# Altium PCB IR_robottino_PCB2.PcbDoc
Units mm, origin at the board's own origin, x right, y up, seen from the top; angles counter-clockwise.
Board outline 8 x 15.63 mm, 4 copper layers (Top Layer, Internal Plane 1, Internal Plane 2, Bottom Layer); 4 components, 5 nets, 13 pads, 0 vias.
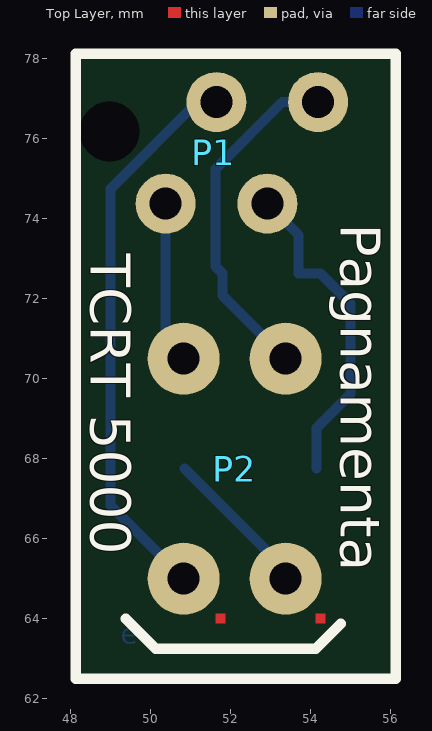
[diagram p0: Top Layer view]
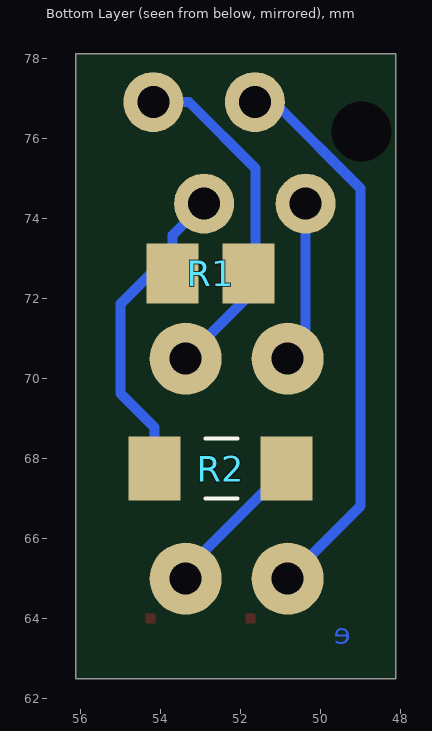
[diagram p1: Bottom Layer view, seen from below]
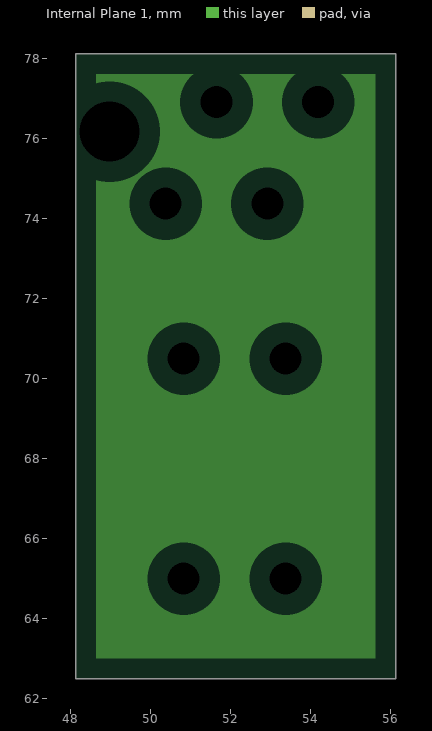
[diagram p2: Internal Plane 1, clearances drawn from the general rule]
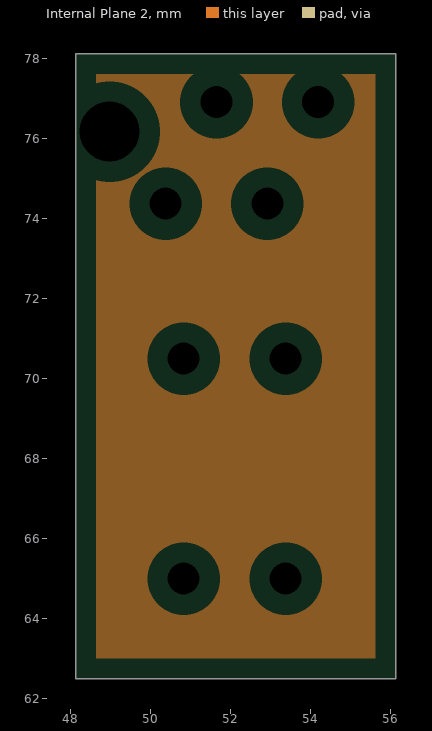
[diagram p3: Internal Plane 2, clearances drawn from the general rule]

## Layer stack, top to bottom
Top Layer: signal copper 0.0356
Dielectric: dielectric 0.32, FR-4, Dk 4.8
Internal Plane 1: plane copper 0.0356
Dielectric: dielectric 0.32, FR-4, Dk 4.8
Internal Plane 2: plane copper 0.0356
Dielectric: dielectric 0.32, FR-4, Dk 4.8
Bottom Layer: signal copper 0.0356

## Board outline
48.125,78.125 56.125,78.125 56.125,62.5 48.125,62.5

## Design rules (kind name [scope] priority, off if disabled: settings)
Clearance [All] p1: gap=0.15
PlaneClearance [All] p1: clearance=0.508
PlaneConnect [All] p1: planeconnectstyle=Direct reliefexpansion=0.508 reliefentries=4 reliefconductorwidth=0.254 reliefairgap=0.254
PolygonConnect PolygonConnect_nettie [InComponent('nt1') vs InNet('GND')] p1: connectstyle=Direct reliefconductorwidth=0.254 reliefentries=4 polygonreliefangle="90 Angle"
PolygonConnect PolygonConnect_pad [InComponent('U3') vs InNet('GND')] p2: connectstyle=Direct reliefconductorwidth=0.254 reliefentries=4 polygonreliefangle="90 Angle"
PolygonConnect [All] p3: connectstyle=Relief reliefconductorwidth=0.254 reliefentries=4 polygonreliefangle="90 Angle"
RoutingVias [All] p1: holewidth=0.35 width=0.6 viastyle="Through Hole" minholewidth=0.2 minwidth=0.4 maxholewidth=1.2 maxwidth=1
SilkscreenOverComponentPads [All] p1: minsilkscreentomaskgap=0.254
SolderMaskExpansion SolderMaskExpansion_via [IsVia] p1: expansion=-0.5
SolderMaskExpansion [All] p2: expansion=0.102
Width [All] p1: maxlimit=1 minlimit=0.203 preferedwidth=0.203
25 further rules are at their usual default settings.

## Components (designator, comment, footprint, x,y, rotation, side; value= is the part's Value field where it differs from the comment)
P1 "I2C" TYCO/215079-4 50.375,74.375 r180 top
P2 "Header 2" "TCRT 5000" 53.375,70.5 r270 top
R1 "15kOhm" R/0805 52.75,72.625 r0 bottom
R2 "75ohm" R/1206 52.5,67.75 r0 bottom

## Footprints (in the part's own frame and the unit in brackets; to place one, negate y for a bottom-side part, rotate by r counter-clockwise, add the part's x,y. Pads: shape width x height; smd on the part's side, far side on the other; paste and mask are expansions set on the pad)
R/0805 [mm] "Chip Resistor; Body 2.0 x 1.3 mm (LxW typ)"
  rect 1.3x1.5 smd: 1(-0.95,0) 2(0.95,0)
  body extent -1,-0.62 1,0.63, height 0.78
R/1206 [mm] "Chip Resistor, Body 3.2x1.6mm, IPC Low Density"
  rect 1.3x1.6 smd: 1(-1.651,0) 2(1.651,0)
  silkscreen extent -0.43,-0.75 0.38,0.75, body extent -1.6,-0.8 1.6,0.8, height 1
"TCRT 5000" [mm]
  round 1.8 hole 0.8: 1(5.5,0) 2(0,0) 3(0,-2.55) 4(5.5,-2.55)
  Top Layer region: 6.375,-1.75 6.625,-1.75 6.625,-1.5 6.375,-1.5
  Top Layer region: 6.375,0.75 6.625,0.75 6.625,1 6.375,1
TYCO/215079-4 [mm]
  round 1.5 hole 0.8: 1(0,0) 2(-1.27,-2.54) 3(-2.54,0) 4(-3.81,-2.54)
  round 1.3 hole 1.5 unplated: 5(1.4,-1.8)
  body extent -5.41,-3.74 1.6,1.26, height 4

## Part data
P1: library part Micromatch-I2C, "Micromatch I2C Connector"
P2: library part "TCRT 5000", "Header, 2-Pin"
R1 R2: library part R, "Resistor"

## Nets (pads, with @x,y where several pads share a name; then routed paths per layer and width w, separated by ;. In a path a pad name is that pad's centre, name@x,y a point inside that pad or via, vN(x,y) a via of type N, cw(c..) or ccw(c..) an arc to the next point about the centre after c; other vN are vias at no path point)
DATA: P1.4 P2.2 R1.1 | length 8.7
  Bottom Layer w0.25: P2.2 51.8,72.075 R1.1 51.625,72.8 51.625,75.25 53.29,76.915 P1.4
GND: P1.1 P2.3 | length 4.1
  Bottom Layer w0.25: P1.1 50.375,70.95 P2.3
NetP1_3: P1.3 R1.2 R2.2 | length 8.7
  Bottom Layer w0.25: P1.3@53.5,74.375 P1.3 53.7,73.59 R1.2 54.25,72.625 55,71.875 55,69.625 54.151,68.776 R2.2
NetP2_1: P2.1 R2.1 | length 3.8
  Bottom Layer w0.25: R2.1 53.375,65.224 P2.1
ON/OFF: P1.2 P2.4 | length 14
  Bottom Layer w0.25: P2.4 49,66.825 49,74.75 51.165,76.915 P1.2
pads on no net: P1.5

## Polygon pours and split planes (outlines as drawn)
no net on Internal Plane 1 (split plane): 55.615,63.01 50.885,63.01 50.885,77.615 55.615,77.615
no net on Internal Plane 1 (split plane): 49.865,63.01 48.635,63.01 48.635,77.615 49.865,77.615
no net on Internal Plane 2 (split plane): 55.615,63.01 50.885,63.01 50.885,77.615 55.615,77.615
no net on Internal Plane 2 (split plane): 49.865,63.01 48.635,63.01 48.635,77.615 49.865,77.615

## Other copper
Bottom Layer:
  text "e" at 49.25,63.375 h0.5

## Silkscreen, mask and mechanical layers (free items; w line width, h text height)
Top Overlay:
  lines w0.254: 49.375,64 50.125,63.25 ; 54.75,63.875 54.125,63.25 50.125,63.25 ; 50.125,63.25 50.125,63.25 ; 48.125,62.5 56.125,62.5 56.125,78.125 48.125,78.125 48.125,62.5
  text "Pagnamenta" at 54.75,73.875 h1 r270
  text "TCRT 5000" at 48.5,73.125 h1 r270